# Altium PCB MioShield.PcbDoc
Units mm, origin at the board's own origin, x right, y up, seen from the top; angles counter-clockwise.
Board outline 68.58 x 53.34 mm, 2 copper layers (Top Layer, Bottom Layer); 35 components, 31 nets, 159 pads, 27 vias.
Unrouted connection lines stored in the file: 1.
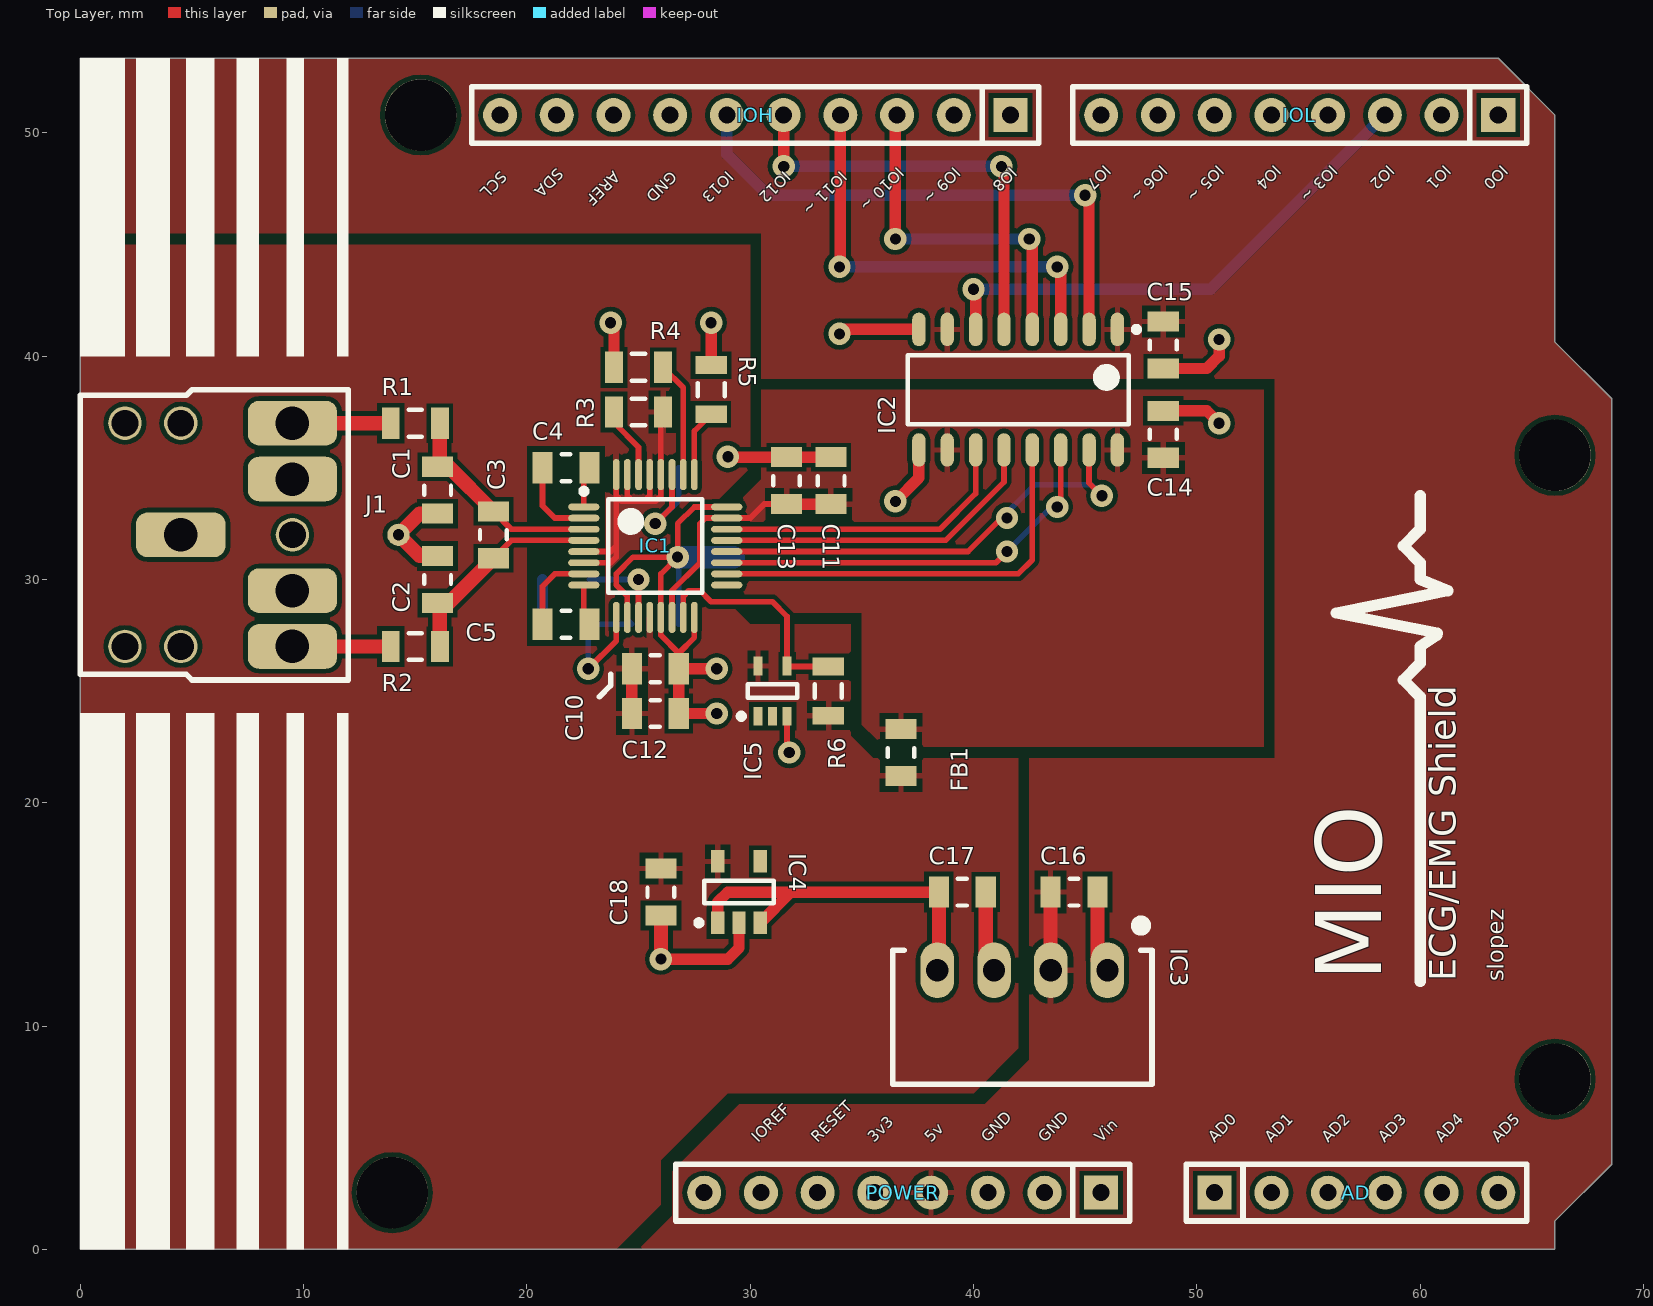
[diagram p0: Top Layer view]
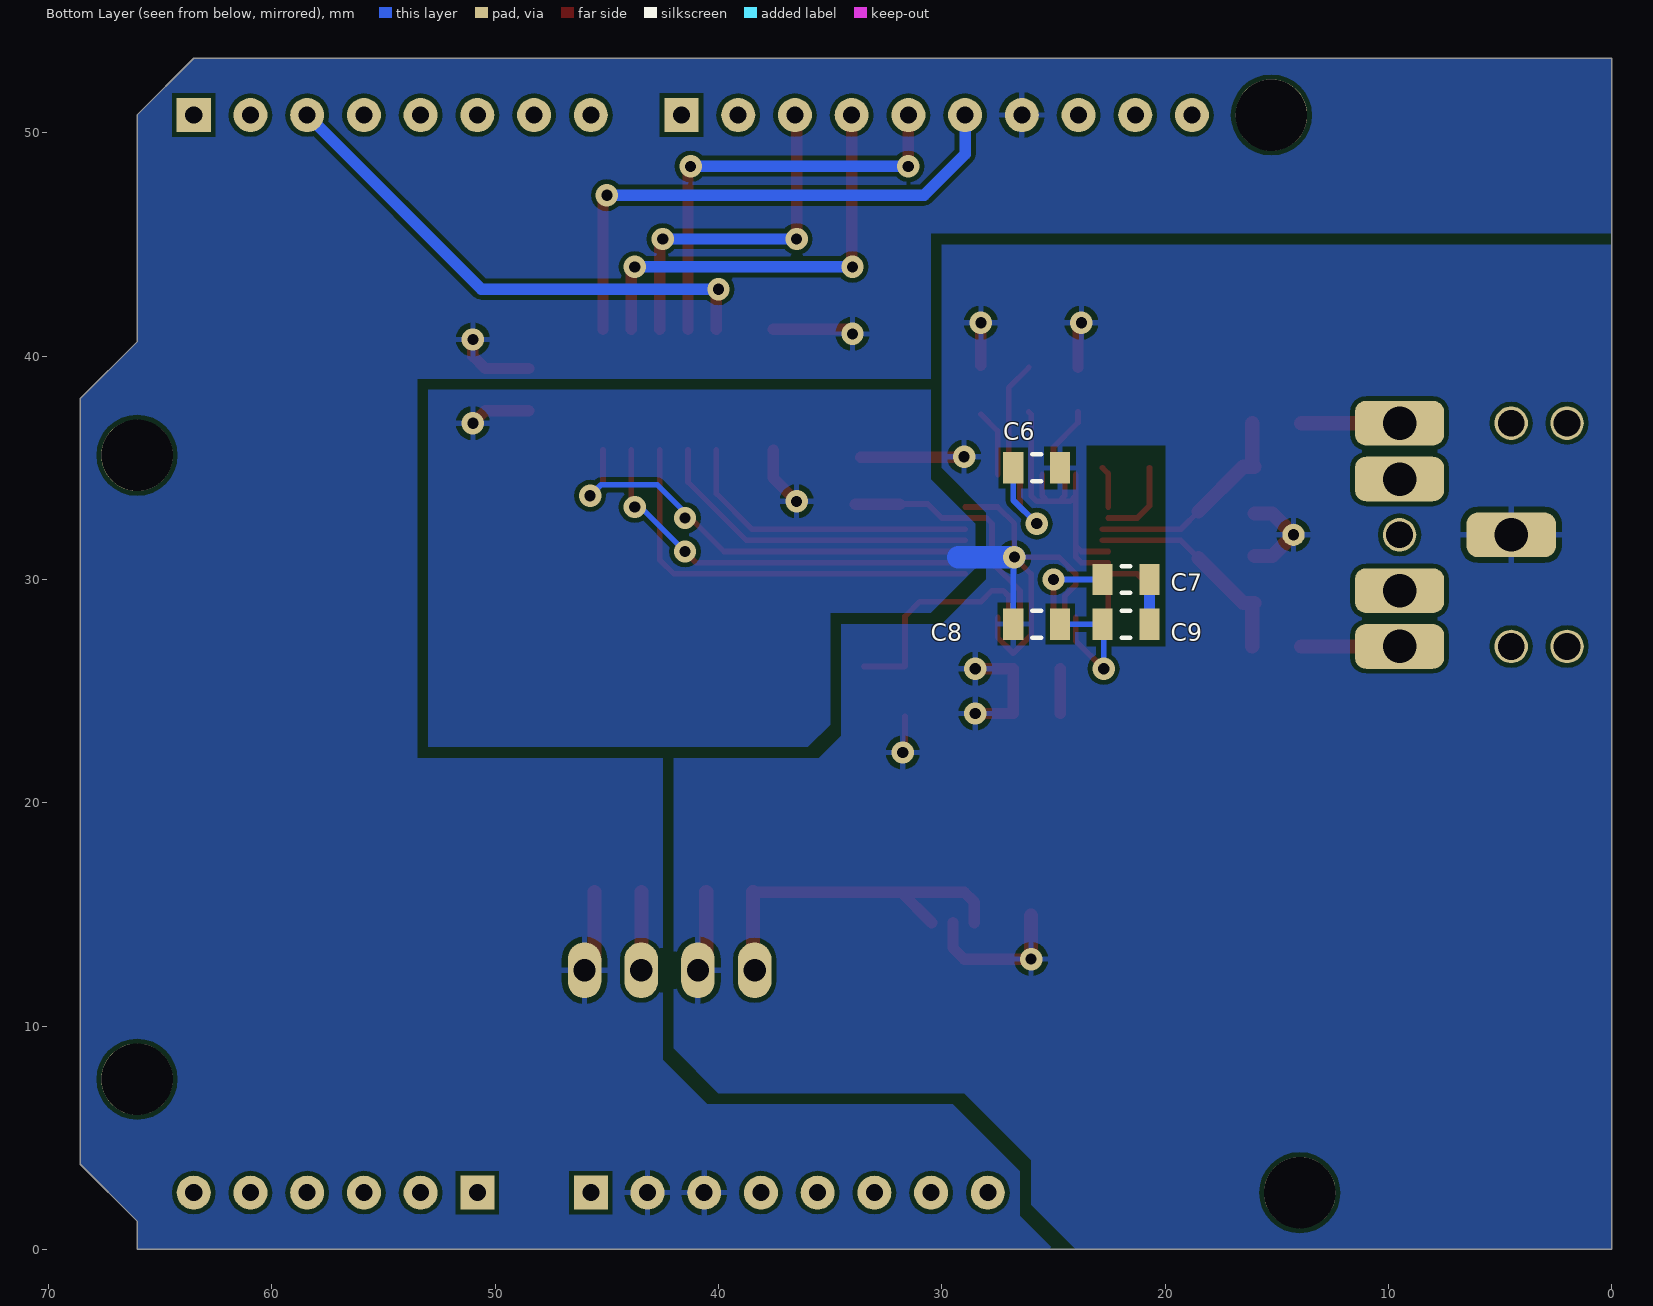
[diagram p1: Bottom Layer view, seen from below]
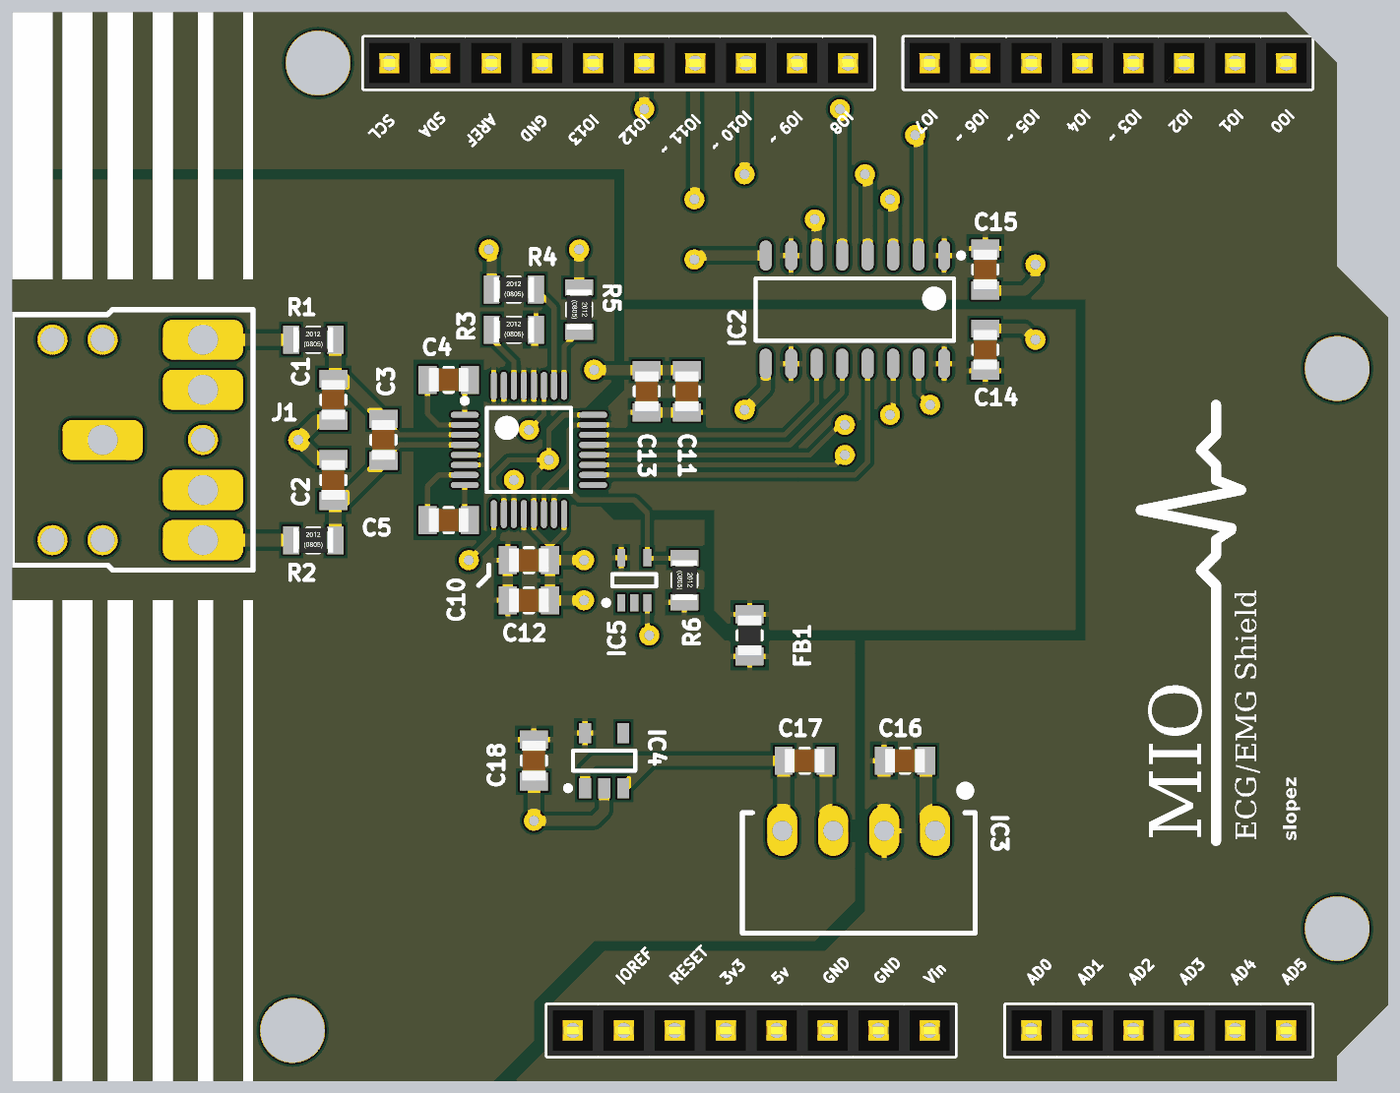
[diagram p2: 3D render of the assembled board from above, using the file's embedded part models]
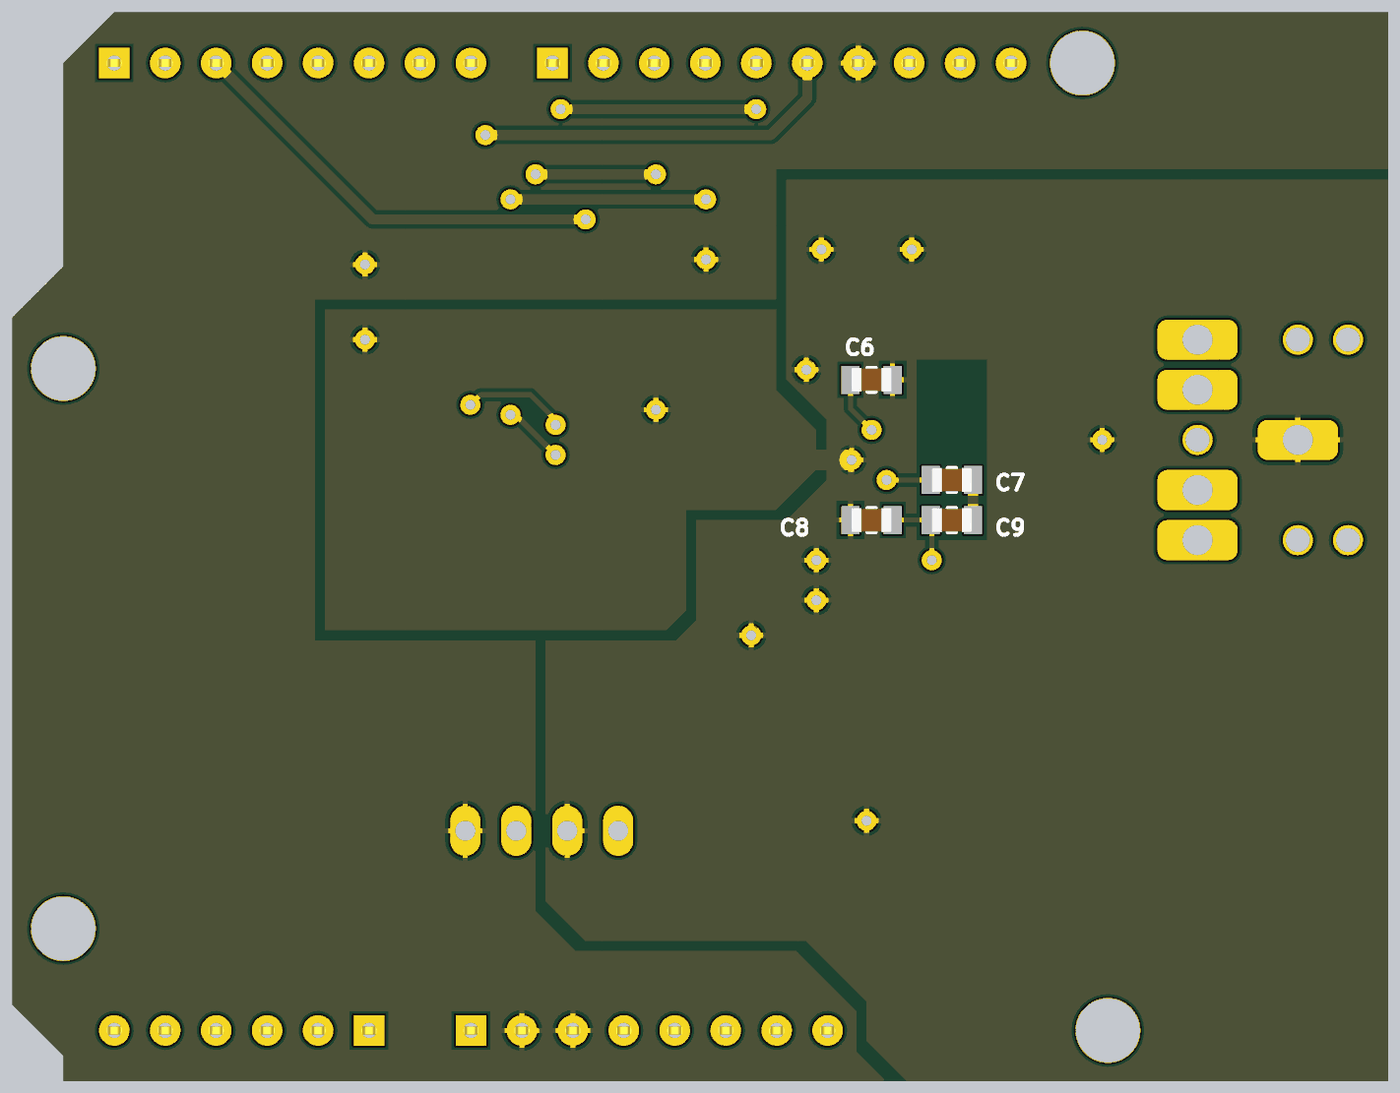
[diagram p3: 3D render of the assembled board from below, using the file's embedded part models]

## Layer stack, top to bottom
Top Solder: solder mask 0.0102, Solder Resist, Dk 3.5
Top Layer: signal copper 0.0356
Dielectric1: dielectric 0.32, FR-4, Dk 4.8
Bottom Layer: signal copper 0.0356
Bottom Solder: solder mask 0.0102, Solder Resist, Dk 3.5

## Board outline
0,0 0,53.34 63.5,53.34 66.04,50.8 66.04,40.64 68.58,38.1 68.58,3.81 66.04,1.27 66.04,0

## Design rules (kind name [scope] priority, off if disabled: settings)
Clearance Clearance_smd [IsPad vs IsPad] p1: gap=0.152
Clearance [All] p2: gap=0.203
HoleSize [All] p1: absolutevalues=TRUE maxlimit=6 minlimit=0.3 maxpercent=80.000 minpercent=20.000
PolygonConnect [All] p1: connectstyle=Relief reliefconductorwidth=0.254 reliefentries=4 polygonreliefangle="90 Angle" airgapwidth=0.254
RoomDefinition MioShield [InComponentClass('MioShield')] p1: confinementstyle=ConfineIn formatcopy=TRUE lockcomponents=FALSE outline 0,0 68.58,0 68.58,53.34 0,53.34
RoomDefinition "SPI Isolation" [InComponentClass('SPI Isolation')] p2: confinementstyle=ConfineIn formatcopy=TRUE lockcomponents=FALSE outline 36.75,22 53,22 53,45 36.75,45
RoomDefinition "Isolated Power Supply" [InComponentClass('Isolated Power Supply')] p3: confinementstyle=ConfineIn formatcopy=TRUE lockcomponents=FALSE outline 22,7 53,7 53,28.75 22,28.75
RoomDefinition "Analog Front End" [InComponentClass('Analog Front End')] p4: confinementstyle=ConfineIn formatcopy=TRUE lockcomponents=FALSE outline -0.5,20.25 38,20.25 38,45 -0.5,45
RoutingVias [All] p1: holewidth=0.5 width=1 viastyle="Through Hole" minholewidth=0.3 minwidth=0.5 maxholewidth=0.6 maxwidth=1.2
SilkToSolderMaskClearance SilkscreenOverComponentPads_IC [IsPad vs InComponent('IC1')] p1: minsilkscreentomaskgap=0 clearancetoexposedcopper=TRUE
SilkToSolderMaskClearance SilkscreenOverComponentPads [IsPad] p2: minsilkscreentomaskgap=0.254 clearancetoexposedcopper=TRUE
SolderMaskExpansion [All] p1: expansion=0.102
UnpouredPolygon [All] p1: allowunpoured=FALSE
Width [All] p1: maxlimit=2.54 minlimit=0.254 preferedwidth=0.254
27 further rules are at their usual default settings.

## Classes and differential pairs
component class MioShield: AD IOH IOL POWER
component class "Analog Front End": C1 C2 C3 C4 C5 C6 C7 C8 C9 C10 C11 C12 C13 FB1 IC1 J1 R1 R2 R3 R4 R5
component class "Isolated Power Supply": C16 C17 C18 IC3 IC4 IC5 R6
component class "SPI Isolation": C14 C15 IC2

## Components (designator, comment, footprint, x,y, rotation, side; value= is the part's Value field where it differs from the comment)
AD "AD" "Header 6x1 8.5mm" 50.8,2.54 r0 top locked
C1 "47p" "0805 CAP" 16,34 r90 top
C2 "47p" "0805 CAP" 16,30 r90 top
C3 "470p" "0805 CAP" 18.5,32 r90 top
C4 "4.7n" "0805 CAP" 21.75,35 r0 top
C5 "4.7n" "0805 CAP" 21.75,28 r180 top
C6 "1u" "0805 CAP" 25.75,35 r0 bottom
C7 "1u" "0805 CAP" 21.75,30 r0 bottom
C8 "10u" "0805 CAP" 25.75,28 r180 bottom
C9 "0.1u" "0805 CAP" 21.75,28 r0 bottom
C10 "1u" "0805 CAP" 25.75,26 r180 top
C11 "1u" "0805 CAP" 33.623,34.427 r270 top
C12 "0.1u" "0805 CAP" 25.75,24 r180 top
C13 "0.1u" "0805 CAP" 31.623,34.427 r270 top
C14 "1u" "0805 CAP" 48.5,36.5 r270 top
C15 "1u" "0805 CAP" 48.5,40.5 r90 top
C16 "4.7u" "0805 CAP" 44.5,16 r180 top
C17 "1u" "0805 CAP" 39.5,16 r180 top
C18 "1u" "0805 CAP" 26,16 r90 top
FB1 "220 ohm 100 Mhz" "0805 Ind" 36.75,22.25 r90 top
IC1 "ADS1291" TSQFP50P700X700X120-32N 25.75,31.5 r0 top
IC2 "Si8652" SOIC127P600X175-16N 42,38.5 r270 top
IC3 "CUI PDS1-S5-S5-S" SIL4 46,12.5 r180 top
IC4 "LP5907" SOT95P280X145-5N 29.5,16 r90 top
IC5 "LMS33460" SOT65P210X110-5N 31,25 r90 top
IOH "IOH" "Header 10x1 8.5mm" 41.656,50.8 r180 top locked
IOL "IOL" "Header 8x1 8.5mm" 63.5,50.8 r180 top locked
J1 "Jack 3.5mm" "Jack 3.5mm" 9.5,32 r0 top
POWER "POWER_UNO" "Header 8x1 8.5mm" 45.72,2.54 r180 top locked
R1 "47K" "0805 Res" 15,37 r0 top
R2 "47K" "0805 Res" 15,27 r0 top
R3 "1M" "0805 Res" 25,37.5 r0 top
R4 "100" "0805 Res" 25,39.5 r0 top
R5 "100" "0805 Res" 28.25,38.5 r270 top
R6 "470K" "0805 Res" 33.5,25 r270 top

## Footprints (in the part's own frame and the unit in brackets; to place one, negate y for a bottom-side part, rotate by r counter-clockwise, add the part's x,y. Pads: shape width x height; smd on the part's side, far side on the other; paste and mask are expansions set on the pad)
"0805 CAP" [mm] "Chip Capacitor, 2-Leads, Body 2,00x1,25mm, IPC Medium Density"
  rect 0.9x1.4 smd: 1(-1.05,0) 2(1.05,0)
  silkscreen extent -0.2,-0.6 0.2,0.6, body extent -1,-0.6 1,0.6, height 1.2
"0805 Ind" [mm] "Chip Capacitor, 2-Leads, Body 2,00x1,25mm, IPC Medium Density"
  rect 0.9x1.4 smd: 1(-1.05,0) 2(1.05,0)
  silkscreen extent -0.2,-0.6 0.2,0.6, body extent -1,-0.6 1,0.6, height 0.95
"0805 Res" [mm] "Chip Capacitor, 2-Leads, Body 2,0x1,3mm, IPC Medium Density"
  rect 0.8x1.4 smd: 1(-1.1,0) 2(1.1,0)
  silkscreen extent -0.3,-0.6 0.3,0.6, body extent -1,-0.62 1,0.62, height 0.44
"Header 6x1 8.5mm" [mil] "Stackable 6 pin header"
  rect 60x60 hole 30: 1(0,0)
  round 60 hole 30: 2(100,0) 3(200,0) 4(300,0) 5(400,0) 6(500,0)
  silkscreen extent -50,-50 550,50, body extent -50,-50 550,50, height 335
"Header 8x1 8.5mm" [mil] "Stackable 8 pin header"
  rect 60x60 hole 30: 1(0,0)
  round 60 hole 30: 2(100,0) 3(200,0) 4(300,0) 5(400,0) 6(500,0) 7(600,0) 8(700,0)
  silkscreen extent -50,-50 750,50, body extent -50,-50 750,50, height 335
"Header 10x1 8.5mm" [mil] "Stackable 10 pin header"
  rect 60x60 hole 30: 1(0,0)
  round 60 hole 30: 2(100,0) 3(200,0) 4(300,0) 5(400,0) 6(500,0) 7(600,0) 8(700,0) 9(800,0) 10(900,0)
  silkscreen extent -50,-50 950,50, body extent -50,-50 950,50, height 335
"Jack 3.5mm" [mm]
  rrect50% 4x2 hole 1.5: 1(-5,0) 2(0,-5) 3(0,5) 4(0,-2.5) 5(0,2.5)
  round 1.5 hole 1.2 unplated: ""(-7.5,-5) ""(-7.5,5) ""(-5,-5) ""(-5,5) ""(0,0)
  silkscreen extent -9.5,-6.5 2.5,6.5
SIL4 [mm]
  oval 1.5x2.5 hole 1: 1(0,0) 2(2.54,0) 3(5.08,0) 4(7.62,0)
  silkscreen extent -1.99,-2.2 9.61,5.1
SOIC127P600X175-16N [mm] "SOIC, 16-Leads, Body 9,90x3,90mm, Pitch 1,27mm, IPC Medium Density"
  oval 1.5x0.6 smd: 1(-2.7,4.445) 2(-2.7,3.175) 3(-2.7,1.905) 4(-2.7,0.635) 5(-2.7,-0.635) 6(-2.7,-1.905) 7(-2.7,-3.175) 8(-2.7,-4.445) 9(2.7,-4.445) 10(2.7,-3.175) 11(2.7,-1.905) 12(2.7,-0.635) 13(2.7,0.635) 14(2.7,1.905) 15(2.7,3.175) 16(2.7,4.445)
  silkscreen extent -2.82,-4.95 1.55,5.42, body extent -1.95,-4.95 1.95,4.95, height 1.75
SOT65P210X110-5N [mm] "SOT23, 5-Leads, Body 2,00x2,10mm, Pitch 0,65mm, IPC Medium Density"
  rect 0.85x0.4 smd: 1(-1.125,0.65) 2(-1.125,0) 3(-1.125,-0.65) 4(1.125,-0.65) 5(1.125,0.65)
  silkscreen extent -1.25,-1.1 0.3,1.52, body extent -0.7,-1.07 0.7,1.08, height 1.1
SOT95P280X145-5N [mm] "SOT23, 5-Leads, Body 2,90x2,80mm, Pitch 0,95mm, IPC Medium Density"
  rect 1x0.6 smd: 1(-1.375,0.95) 2(-1.375,0) 3(-1.375,-0.95) 4(1.375,-0.95) 5(1.375,0.95)
  silkscreen extent -1.5,-1.55 0.5,1.92, body extent -0.88,-1.52 0.87,1.53, height 1.45
TSQFP50P700X700X120-32N [mm] "TSQFP, 32-Leads, Body 5,00x5,00mm, Pitch 0,50mm, IPC Medium Density"
  oval 1.4x0.3 smd: 1(-3.2,1.75) 2(-3.2,1.25) 3(-3.2,0.75) 4(-3.2,0.25) 5(-3.2,-0.25) 6(-3.2,-0.75) 7(-3.2,-1.25) 8(-3.2,-1.75) 17(3.2,-1.75) 18(3.2,-1.25) 19(3.2,-0.75) 20(3.2,-0.25) 21(3.2,0.25) 22(3.2,0.75) 23(3.2,1.25) 24(3.2,1.75)
  oval 0.3x1.4 smd: 9(-1.75,-3.2) 10(-1.25,-3.2) 11(-0.75,-3.2) 12(-0.25,-3.2) 13(0.25,-3.2) 14(0.75,-3.2) 15(1.25,-3.2) 16(1.75,-3.2) 25(1.75,3.2) 26(1.25,3.2) 27(0.75,3.2) 28(0.25,3.2) 29(-0.25,3.2) 30(-0.75,3.2) 31(-1.25,3.2) 32(-1.75,3.2)
  silkscreen extent -3.32,-2.1 2.1,2.57, body extent -2.5,-2.5 2.5,2.5, height 1.2

## Part data
C1 C2 C3 C4 C5 C6 C7 C8 C9 C10 C11 C12 C13 C14 C15 C16 C17 C18: library part Cap
FB1: library part Ferrita, "INDUCTOR, 0.04OHM, 3A, 0805"
R1 R2 R3 R4 R5 R6: library part Res

## Free pads (board coordinates)
  round 3.2 hole 3.2: 0(13.97,2.54) 0(15.24,50.8) 0(66.04,7.62) 0(66.04,35.56)
  round 1 hole 0.5: 0(14.25,32)

## Via types
v1: diameter 1, hole 0.5, Top Layer to Bottom Layer, 27 vias

## Nets (pads, with @x,y where several pads share a name; then routed paths per layer and width w, separated by ;. In a path a pad name is that pad's centre, name@x,y a point inside that pad or via, vN(x,y) a via of type N, cw(c..) or ccw(c..) an arc to the next point about the centre after c; other vN are vias at no path point)
3.3V: C10.2 C12.2 C18.2 FB1.1 IC1.5 IC1.6 IC1.12 IC1.28 IC1.29 IC1.31 IC1.32 IC4.5 IC5.5 R3.2 R6.2 | length 17.4
  Top Layer w0.254: IC1.6 23.75,30.75 24,31 24,31.5 ; IC1.5 23.75,31.25 24,31.5 ; IC1.32 24,33.75 ; IC1.31 24.5,33.75 24.75,33.5 ; IC1.29 25.5,33.75 25.25,33.5 ; R3.2 26,37.4 IC1.28 26,33.75 25.75,33.5 25.25,33.5 ; 24,31.5 24,33.75 ; 24,33.75 24.25,33.5 24.75,33.5 ; 24.75,33.5 25.25,33.5
  Top Layer w0.508: C12.2 C10.2
5V: C15.2 C16.2 IC2.1 IC2.7 IC3.2 POWER.4 | length 3.5
  Top Layer w0.635: C16.2 43.45,12.51 IC3.2
5V_ISO: C17.2 IC3.4 IC4.1 IC4.3 | length 16.5
  Top Layer w0.508: IC4.1 28.55,15.55 29,16 31.825,16 ; IC4.3 31.825,16 ; C17.2 31.825,16
  Top Layer w0.635: IC3.4 38.45,12.57 C17.2
AGND: C1.1 C2.2 C6.1 C7.1 C8.1 C9.1 C10.1 C11.1 C12.1 C13.1 C14.1 C17.1 C18.1 IC1.10 IC1.13 IC1.16 IC1.24 IC2.9 IC3.3 IC4.2 IC5.3 J1.1 pad.0@14.25,32 R4.1 R5.1 | length 59.4
  Top Layer w0.254: IC1.10 24.5,29.25 24,29.75 24,30.25 24.75,31 v1(26.75,31) ; IC1.16 27.5,27.4 26.8,26.7 26,27.5 IC1.13 26,30.25 v1(26.75,31) ; IC1.24 27.5,33.25 26.75,32.5 v1(26.75,31) ; IC5.3 31.65,22.35 v1(31.75,22.25)
  Top Layer w0.508: v1(23.75,41.5) 23.9,41.35 R4.1 ; v1(26,13) 29,13 29.5,13.5 IC4.2 ; R5.1 v1(28.25,41.5) ; v1(28.5,24) C12.1 C10.1 v1(28.5,26) ; v1(29,35.5) 29.023,35.477 C13.1 C11.1 ; v1(36.5,33.5) 37.555,34.555 IC2.9 ; C14.1 50.45,37.55 v1(51,37)
  Top Layer w0.635: C2.2 15.2,31.05 14.25,32 15.2,32.95 C1.1 ; v1(26,13) C18.1 ; C17.1 40.55,12.87 IC3.3
  Bottom Layer w0.254: v1(26.75,31) 26.8,30.95 C8.1
  Bottom Layer w0.508: C9.1 C7.1
  Bottom Layer w1.016: v1(26.75,31) 29.25,31
CS: IC2.4 IOH.3 | length 15.7
  Top Layer w0.254: IOH.3@36.5,50.724 IOH.3 ; v1(42.5,45.25) v1@42.635,45.115
  Top Layer w0.508: v1(36.5,45.25) IOH.3@36.5,50.724 ; IC2.4 v1@42.635,45.115
  Bottom Layer w0.508: v1(36.5,45.25) v1(42.5,45.25)
DVDD: C11.2 C13.2 C14.2 FB1.2 IC1.14 IC1.23 IC2.10 IC2.16 | length 11.2
  Top Layer w0.254: IC1.14 26.5,29.5 27.75,30.75 27.75,32.5 28,32.75 IC1.23 30,32.75 30.627,33.377 C13.2@31.873,33.377
  Top Layer w0.508: C13.2@31.873,33.377 C11.2@33.873,33.377
MISO: IC2.5 IOH.5 | length 19.4
  Top Layer w0.254: IOH.5 IOH.5@31.5,50.796 ; v1(41.25,48.5) v1@41.365,48.385
  Top Layer w0.508: v1(31.5,48.5) IOH.5@31.5,50.796 ; IC2.5 v1@41.365,48.385
  Bottom Layer w0.508: v1(31.5,48.5) v1(41.25,48.5)
MOSI: IC2.3 IOH.4 | length 19.4
  Top Layer w0.254: v1(34,44) v1@34.036,44.036 ; v1(43.75,44) v1@43.905,43.845
  Top Layer w0.508: v1@34.036,44.036 IOH.4 ; IC2.3 v1@43.905,43.845
  Bottom Layer w0.508: v1(34,44) v1(43.75,44)
NetC1_2: C1.2 C3.2 IC1.3 R1.2 | length 10
  Top Layer w0.254: C3.2 19.3,32.25 IC1.3@22.8,32.25
  Top Layer w0.635: R1.2 16.1,35.15 C1.2 16.5,35.05 C3.2
NetC2_1: C2.1 C3.1 IC1.4 R2.2 | length 10
  Top Layer w0.254: C3.1 19.3,31.75 IC1.4@22.8,31.75
  Top Layer w0.635: R2.2 16.1,28.85 C2.1 16.5,28.95 C3.1
NetC4_1: C4.1 IC1.2 | length 3.8
  Top Layer w0.254: C4.1 20.7,33.3 21.25,32.75 IC1.2
NetC4_2: C4.2 IC1.1 | length 1.9
  Top Layer w0.254: IC1.1 22.55,34.75 C4.2
NetC5_1: C5.1 IC1.8 | length 1.9
  Top Layer w0.254: IC1.8 22.55,28.25 C5.1
NetC5_2: C5.2 IC1.7 | length 3.8
  Top Layer w0.254: C5.2 20.7,29.7 21.25,30.25 IC1.7
NetC6_2: C6.2 IC1.27 | length 5.4
  Top Layer w0.254: v1(25.75,32.5) 26.5,33.25 IC1.27
  Bottom Layer w0.254: v1(25.75,32.5) 26.8,33.55 C6.2
NetC7_2: C7.2 IC1.11 | length 3.9
  Top Layer w0.254: IC1.11 v1(25,30)
  Bottom Layer w0.254: C7.2 v1(25,30)
NetC8_2: C8.2 C9.2 IC1.9 | length 7
  Top Layer w0.254: v1(22.75,26) 24,27.25 IC1.9
  Bottom Layer w0.254: v1(22.75,26) 22.75,27.95 C9.2 C8.2 C8.2@24.5,28.2
NetIC1_15: IC1.15 IC5.4 R6.1 | length 10.3
  Top Layer w0.254: IC1.15 27,29.25 27.25,29.5 27.75,29.5 28.25,29 31,29 31.65,28.35 IC5.4 31.675,26.1 R6.1
NetIC1_18: IC1.18 IC2.13 | length 18.9
  Top Layer w0.254: IC1.18 42,30.25 42.635,30.885 IC2.13
NetIC1_19: IC1.19 IC2.14 | length 18.4
  Top Layer w0.254: IC1.19 41,30.75 v1(41.5,31.25) ; v1(43.75,33.25) 43.905,33.405 IC2.14
  Bottom Layer w0.254: v1(41.5,31.25) 43.5,33.25 v1(43.75,33.25)
NetIC1_20: IC1.20 IC2.15 | length 20.7
  Top Layer w0.254: IC1.20 39.75,31.25 41.25,32.75 v1(41.5,32.75) ; IC2.15 45.175,34.325 v1(45.75,33.75)
  Bottom Layer w0.254: v1(41.5,32.75) 41.5,33 42.75,34.25 45.25,34.25 v1(45.75,33.75)
NetIC1_21: IC1.21 IC2.12 | length 14.9
  Top Layer w0.254: IC1.21 38.75,31.75 41.365,34.365 IC2.12
NetIC1_22: IC1.22 IC2.11 | length 13.8
  Top Layer w0.254: IC1.22 38.5,32.25 40.095,33.845 IC2.11
NetIC1_25: IC1.25 R5.2 | length 3
  Top Layer w0.254: IC1.25 27.5,36.65 R5.2
NetIC1_26: IC1.26 R4.2 | length 5.2
  Top Layer w0.254: R4.2 27,38.6 IC1.26
NetIC1_30: IC1.30 R3.1 | length 3.3
  Top Layer w0.254: R3.1 23.9,37.024 25,35.924 IC1.30
NetIC2_6: IC2.6 IOL.3 | length 23.5
  Top Layer w0.508: v1(40,43) 40.095,42.905 IC2.6
  Bottom Layer w0.508: v1(40,43) 50.62,43 IOL.3
NetJ1_2: J1.2 R2.1 | length 4.4
  Top Layer w0.635: J1.2 R2.1
NetJ1_3: J1.3 R1.1 | length 4.4
  Top Layer w0.635: J1.3 R1.1
SCK: IC2.2 IOH.6 | length 24.6
  Top Layer w0.254: v1(45,47.209) v1@45.175,47.034
  Top Layer w0.508: IC2.2 v1@45.175,47.034
  Bottom Layer w0.508: IOH.6 28.956,49.044 30.791,47.209 v1(45,47.209)
USBGND: C15.1 C16.1 IC2.8 IC3.1 IOH.7 POWER.2 POWER.3 | length 10.8
  Top Layer w0.508: v1(34,41) 34.2,41.2 IC2.8 ; C15.1 50.446,39.45 51,40.004 v1(51,40.75)
  Top Layer w0.635: C16.1 45.55,12.95 IC3.1
pads on no net: AD.1 AD.2 AD.3 AD.4 AD.5 AD.6 IC1.17 IC4.4 IC5.1 IC5.2 IOH.1 IOH.2 IOH.8 IOH.9 IOH.10 IOL.1 IOL.2 IOL.4 IOL.5 IOL.6 IOL.7 IOL.8 J1. J1.4 J1.5 POWER.1 POWER.5 POWER.6 POWER.7 POWER.8

## Polygon pours and split planes (outlines as drawn)
5V on Top Layer "5V" (solid, pour order 15): 25,0 66.04,0 66.04,1.27 68.58,3.81 68.58,38.1 66.04,40.64 66.04,50.8 63.5,53.34 0,53.34 0,45.5 30.5,45.5 30.5,39 53.5,39 53.5,22 42.5,22 42.5,8.5 40.5,6.5 29.5,6.5 26.5,3.5 26.5,1.5 25,0
DVDD on Top Layer "DVDD" (solid, pour order 8): 42,22.5 36,22.5 35,23.5 35,28 35,28.5 30.5,28.5 28.5,30.5 28.5,32.5 30.5,34.5 30.5,38.5 53,38.5 53,22.5 42,22.5
3.3V on Top Layer "3.3V" (solid, pour order 6): 0,45 0,0 24,0 26,2 26,4 29,7 40,7 42,9 42,22 35.5,22 34.5,23 34.5,28 30,28 28,30 28,33 30,35 30,45 0,45
USBGND on Bottom Layer "USBGND" (solid, pour order 23): 25,0 26.5,1.5 26.5,3.5 29.5,6.5 40.5,6.5 42.5,8.5 42.5,22 53.5,22 53.5,39 30.5,39 30.5,45.5 0,45.5 0,53.34 63.5,53.34 66.04,50.8 66.04,40.64 68.58,38.1 68.58,3.81 66.04,1.27 66.04,0 25,0
AGND on Bottom Layer "DGND" (solid, pour order 21): 53,22.5 36,22.5 35,23.5 35,28.5 30.5,28.5 28.5,30.5 28.5,32.5 30.5,34.5 30.5,38.5 53,38.5 53,22.5
AGND on Bottom Layer "AGND" (solid, pour order 17): 0,45 0,0 24,0 26,2 26,4 29,7 40,7 42,9 42,22 35.5,22 34.5,23 34.5,28 30,28 28,30 28,33 30,35 30,45 0,45

## Other copper
Top Layer:
  pour cut-out: 20,36 23.5,36 23.5,27 20,27
Bottom Layer:
  pour cut-out: 23.5,27 20,27 20,36 23.5,36

## Silkscreen, mask and mechanical layers (free items; w line width, h text height)
Top Overlay:
  region: 0,24 2,24 2,0 0,0
  region: 2.5,24 4,24 4,0 2.5,0
  region: 4.75,24 6,24 6,0 4.75,0
  region: 7,24 8,24 8,0 7,0
  region: 9.25,24 10,24 10,0 9.25,0
  region: 11.5,24 12,24 12,0 11.5,0
  region: 11.5,53.34 12,53.34 12,40 11.5,40
  region: 9.25,53.34 10,53.34 10,40 9.25,40
  region: 7,53.34 8,53.34 8,40 7,40
  region: 4.75,53.34 6,53.34 6,40 4.75,40
  region: 2.5,53.34 4,53.34 4,40 2.5,40
  region: 0,53.34 2,53.34 2,40 0,40
  lines w0.254: 23.25,24.75 23.75,25.25 23.75,25.5 23.75,25.75
  lines w0.508: 60,12 60,24.75 59.25,25.5 60,26.25 60,27 60.75,27.5 ; 60,33.75 60,32.25 59.25,31.5 60,30.75 60,30 61.25,29.5 60,29.25 56.25,28.5 60.769,27.596
  text "IO7" at 45.847,48.588 h0.51 r225
  text "IO6 ~" at 48.387,48.588 h0.51 r225
  text "IO5 ~" at 50.927,48.588 h0.51 r225
  text "IO4" at 53.467,48.588 h0.51 r225
  text "IO3 ~" at 56.007,48.588 h0.51 r225
  text "IO2" at 58.547,48.588 h0.51 r225
  text "IO1" at 61.087,48.588 h0.51 r225
  text "IO0" at 63.627,48.588 h0.51 r225
  text "IO10 ~" at 36.576,48.514 h0.51 r225
  text "IO9 ~" at 39.116,48.514 h0.51 r225
  text "IO8" at 41.656,48.514 h0.51 r225
  text "SDA" at 21.336,48.461 h0.51 r225
  text "SCL" at 18.796,48.334 h0.51 r225
  text "AREF" at 23.876,48.334 h0.51 r225
  text "GND" at 26.416,48.334 h0.51 r225
  text "IO13" at 28.956,48.334 h0.51 r225
  text "IO12" at 31.496,48.334 h0.51 r225
  text "IO11 ~" at 34.036,48.334 h0.51 r225
  text "MIO" at 59.25,12 h5.08 r90
  text "ECG/EMG Shield" at 62,12 h2.03 r90
  text "slopez" at 64,12 h1.27 r90
  text "IOREF" at 30.353,4.752 h0.51 r45
  text "RESET" at 33.02,4.752 h0.51 r45
  text "3v3" at 35.56,4.752 h0.51 r45
  text "5v" at 38.1,4.752 h0.51 r45
  text "GND" at 40.64,4.752 h0.51 r45
  text "GND" at 43.18,4.752 h0.51 r45
  text "Vin" at 45.72,4.752 h0.51 r45
  text "AD0" at 50.8,4.752 h0.51 r45
  text "AD1" at 53.34,4.752 h0.51 r45
  text "AD2" at 55.88,4.752 h0.51 r45
  text "AD3" at 58.42,4.752 h0.51 r45
  text "AD4" at 60.96,4.752 h0.51 r45
  text "AD5" at 63.5,4.752 h0.51 r45
Mechanical 1:
  circle w0.127: c66.04,35.56 r1.6
  circle w0.127: c13.97,2.54 r1.6
  circle w0.127: c66.04,7.62 r1.6
  circle w0.127: c15.24,50.8 r1.6
  lines w0.127: 0,0 66.04,0 66.04,1.27 68.58,3.81 68.58,38.1 66.04,40.64 66.04,50.8 63.5,53.34 0,53.34 0,0

## Dimensions
0,53.34 to 0,0 on Top Overlay
0,53.34 to 68.58,38.1 on Top Overlay